# EAGLE board MGBC-MBL-01_2_0 (EAGLE 9.6.2), part 1 of 2
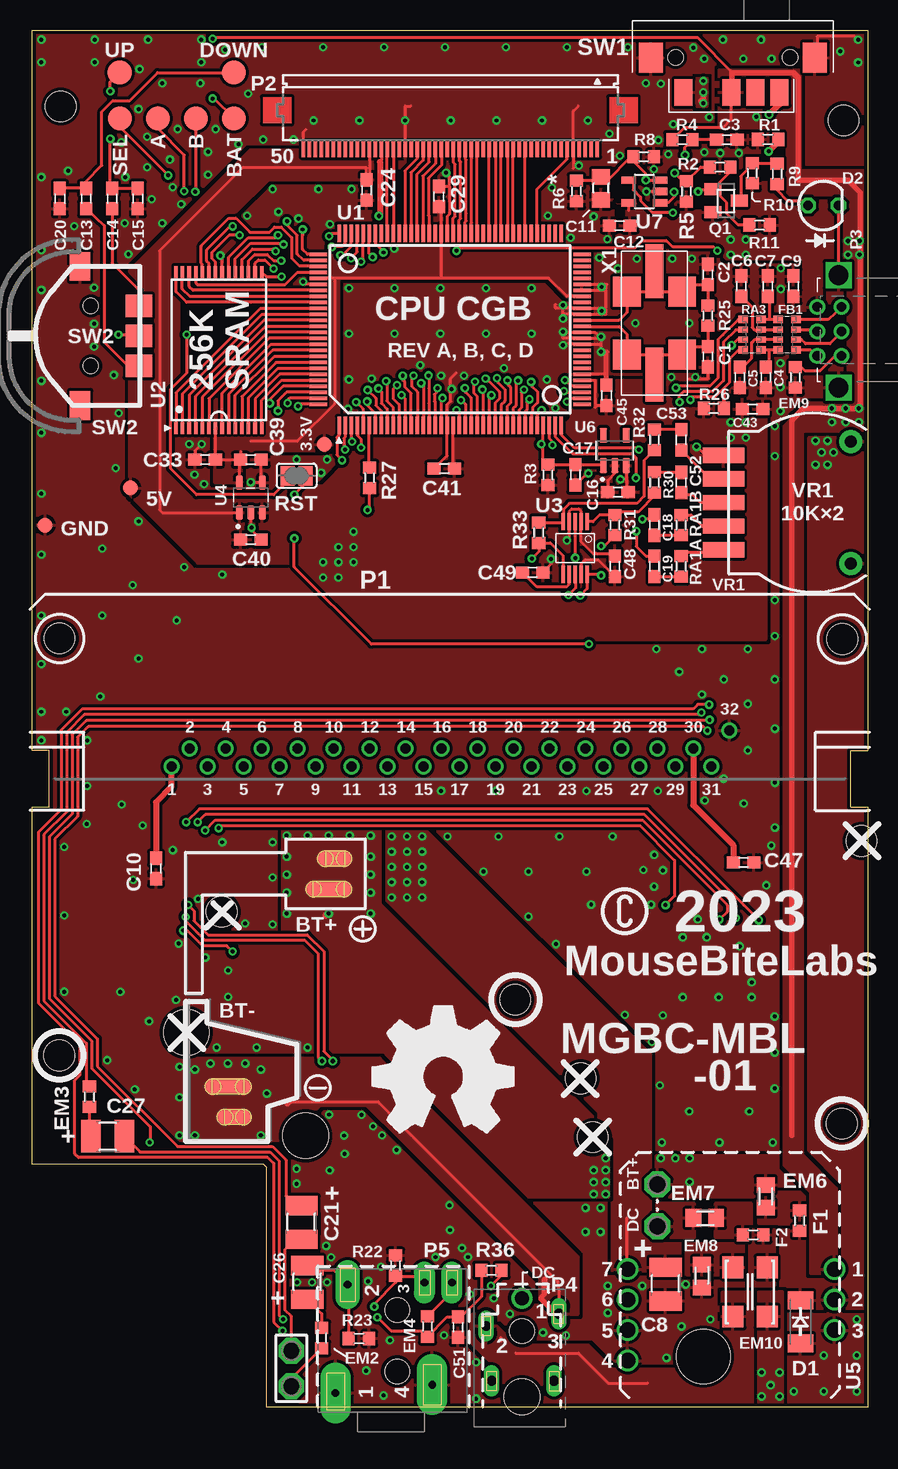
[diagram p0: board, top side]
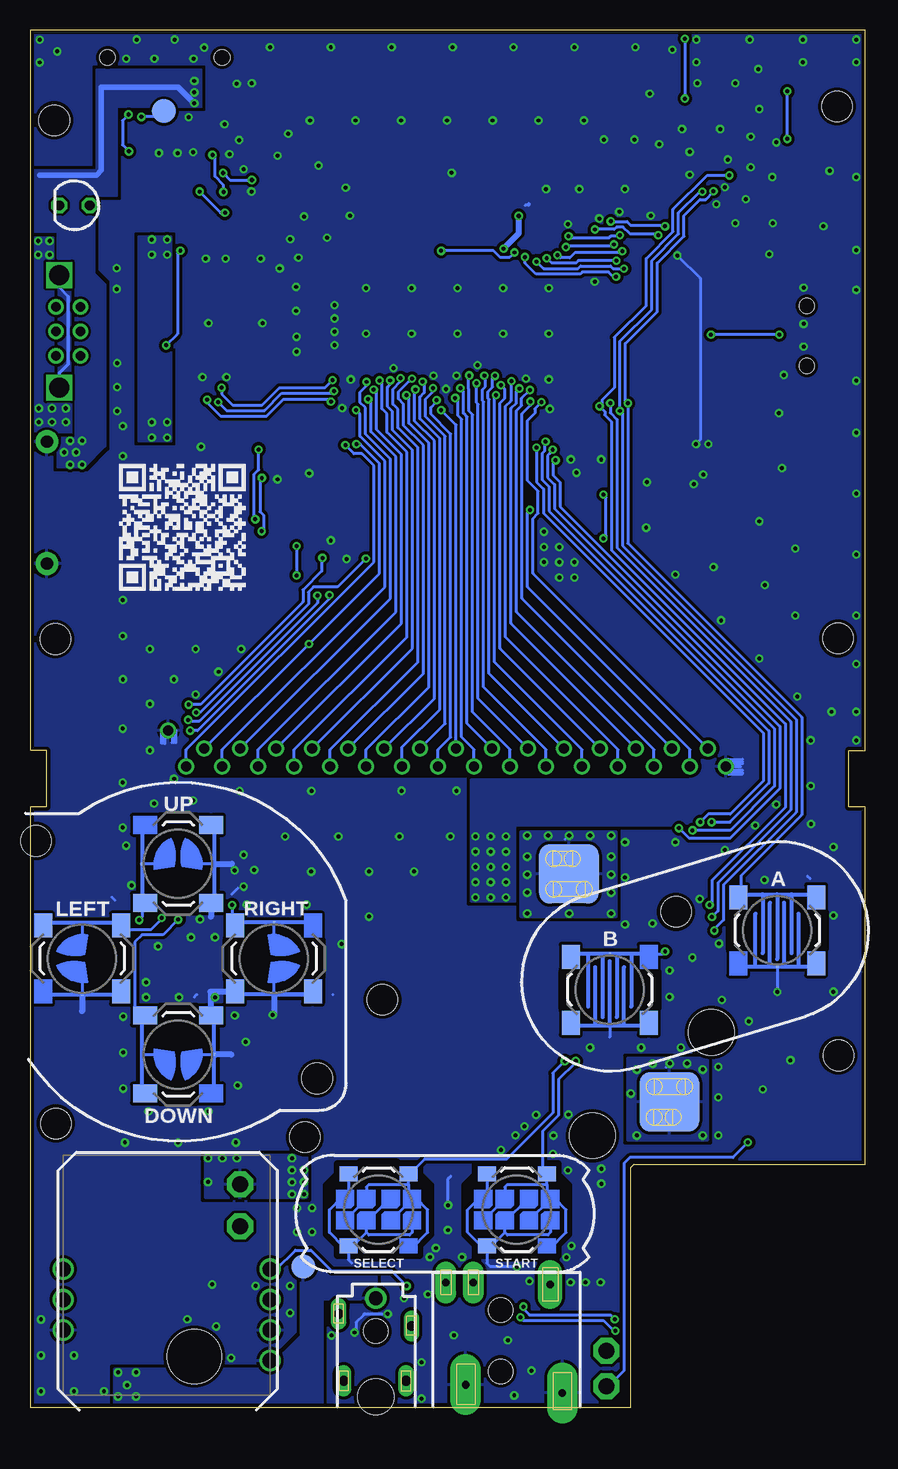
[diagram p1: board, bottom side, seen from below]

Size 69.65 x 114.8 mm. Coordinates in mm from the lower left corner, seen from the top.
Outline: 0,54.75 0,114.8 69.65,114.8 69.65,54.73 68.24,54.73 68.24,50.03 69.65,50.03 69.65,0 19.55,0 19.55,20 19.3,20.25 0,20.25 0,50.05 1.4,50.05 1.4,54.75 0,54.75
Copper layers (1*16): Top 0.0356mm / dielectric 1.5011mm / Bottom 0.0356mm
Design rules "jlcpcb *": minimum track width 10mil, minimum drill 13mil, track to track 8mil, track to pad 8mil, pad to pad 7mil, via to via 8mil, smd to smd 5mil, copper to edge 12mil, drill to drill 22mil, minimum pad ring 10mil, minimum via ring 7mil, stop-mask expansion 2.5mil, vias tented up to drill 14mil, thermal gap 10mil
Holes 2.54 mm at 2.36,108.43 67.63,107.27 2.27,64.08 67.54,64.03 2.24,29.33 67.5,23.64 40.27,33.97 45.71,27.4 46.73,22.5 15.79,41.29 69.14,47.19
Holes 3.81 mm at 12.84,31.23 22.77,22.63
Holes 4.5 mm at 55.95,4.22
tRestrict: area 24.6,-0.8 to 27.7,-0.1; area 45.5,88.8 to 46.2,91.6; area 22.5,14.3 to 23.7,16.2; area 23.8,-1.8 to 35.8,-0.1; area 46.7,21.5 to 48,22.4; area 55.4,100.2 to 57.1,100.8; area 48.9,99.5 to 49.1,99.9; area 48.9,100.7 to 49.8,101
bRestrict: area 24.6,-0.8 to 27.7,-0.1; area 32.8,52.9 to 56.3,53.8; area 23.8,-1.8 to 35.8,0; area 3.7,42.8 to 4,43.2; area 17.4,31.2 to 18.3,32.2; area 45.5,33.8 to 46.4,34.9; area 53.7,48.3 to 54.8,49.2; area 45.4,33.8 to 45.6,35.8

## Footprints (pad centres in the part's own frame; a part is rotated, then mirrored left to right if it is on the bottom)
B1,27 = smd 1.27 x 1.27: TP 0,0
MGB+BATTERY4 = smd 4.953 x 4.953 bottom: P$1 0.5,0 | smd 2.959 x 1.397: P$2 0.997,1.27 | smd 3.937 x 1.397: P$3 0.514,-1.27
MGB-BATTERY4 = smd 4.953 x 4.953 bottom: P$1 0.25,0.117 | smd 2.959 x 1.397: P$3 0.743,-1.143 | smd 3.937 x 1.397: P$4 0.26,1.397
DMG_BTN3 = smd 1.5 x 2: P$1 -3.25,2.75; P$3 3.25,2.75; P$4 3.25,-2.75 | smd 0.25 x 0.25: P$2 0,-3
TP20R = smd 2 x 2: TP 0,0
P1-13 = drill 1.321 pad 2.159 octagon: TP 0,0
C0603 = smd 1.1 x 1: 1 -0.85,0; 2 0.85,0
C1210 = smd 1.6 x 2.7: 1 -1.4,0; 2 1.4,0
C0805 = smd 1.3 x 1.5: 1 -0.95,0; 2 0.95,0
SOD-123_MINI-SMA = smd 1.5 x 2.1: A 1.8,0; C -1.8,0
LED3MM = drill 0.813 octagon: A -1.27,0; K 1.27,0
MGB_BTN1_2 = smd 1.5 x 2: P$1 -3.25,2.75; P$3 3.25,2.75; P$4 3.25,-2.75 | smd 0.25 x 0.25: P$2 0,-3
R0603 = smd 1 x 1.1: 1 -0.85,0; 2 0.85,0
R0805 = smd 1.3 x 1.5: 1 -0.95,0; 2 0.95,0
ACM4532 = smd 1.8 x 1.75: 1 -2.05,1.425; 2 -2.05,-1.425; 3 2.05,-1.425; 4 2.05,1.425
EXB38V = smd 0.6 x 0.8: 1 -1.275,-0.75; 4 1.275,-0.75; 5 1.275,0.75; 8 -1.275,0.75 | smd 0.5 x 0.8: 2 -0.4,-0.75; 3 0.4,-0.75; 6 0.4,0.75; 7 -0.4,0.75
MGB-CART = drill 0.83: 1 0,0; 2 1.5,1.5; 3 3,0; 4 4.5,1.5; 5 6,0; 6 7.5,1.5; 7 9,0; 8 10.5,1.5; 9 12,0; 10 13.5,1.5; 11 15,0; 12 16.5,1.5; 13 18,0; 14 19.5,1.5; 15 21,0; 16 22.5,1.5; 17 24,0; 18 25.5,1.5; 19 27,0; 20 28.5,1.5; 21 30,0; 22 31.5,1.5; 23 33,0; 24 34.5,1.5; 25 36,0; 26 37.5,1.5; 27 39,0; 28 40.5,1.5; 29 42,0; 30 43.5,1.5; 31 45,0; 32 46.5,3
62684-502100AHLF = smd 0.3 x 1.3: 1 -12.25,3.25; 2 -11.75,3.25; 3 -11.25,3.25; 4 -10.75,3.25; 5 -10.25,3.25; 6 -9.75,3.25; 7 -9.25,3.25; 8 -8.75,3.25; 9 -8.25,3.25; 10 -7.75,3.25; 11 -7.25,3.25; 12 -6.75,3.25; 13 -6.25,3.25; 14 -5.75,3.25; 15 -5.25,3.25; 16 -4.75,3.25; 17 -4.25,3.25; 18 -3.75,3.25; 19 -3.25,3.25; 20 -2.75,3.25; 21 -2.25,3.25; 22 -1.75,3.25; 23 -1.25,3.25; 24 -0.75,3.25; 25 -0.25,3.25; 26 0.25,3.25; 27 0.75,3.25; 28 1.25,3.25; 29 1.75,3.25; 30 2.25,3.25; 31 2.75,3.25; 32 3.25,3.25; 33 3.75,3.25; 34 4.25,3.25; 35 4.75,3.25; 36 5.25,3.25; 37 5.75,3.25; 38 6.25,3.25; 39 6.75,3.25; 40 7.25,3.25; 41 7.75,3.25; 42 8.25,3.25; 43 8.75,3.25; 44 9.25,3.25; 45 9.75,3.25; 46 10.25,3.25; 47 10.75,3.25; 48 11.25,3.25; 49 11.75,3.25; 50 12.25,3.25
CGB-LINK = drill 0.8: +5V 1.909,2.032; CLK -2.159,2.032; GND -2.159,0; IN -0.125,2.032; OUT 1.909,0; SD -0.125,0 | drill 1.651 pad 1.905 square: P$7 -4.822,0.254; P$10 4.572,0.254
MGB-PWRJACK = drill 1.143 pad 1.778: 1 -3.629,-2.005 | drill 0.8 pad 1.3 long: 2 -6.604,-4.314; 3 -0.539,-3.302; 4 -6.15,-8.89; 5 -0.953,-8.89 | hole 3: -3.619,-10.222 | hole 2.032: -3.619,-4.753
MGB-HEADPHONE = drill 0.635 pad 2.54 long: GND -4.644,-4.246; SWGND 3.425,-3.556 | drill 0.635 pad 2.032 long: L -3.623,4.779 | drill 0.635 pad 1.75 long: R 2.79,4.949; SW 5.08,4.949 | hole 2.032: 0.508,2.676; 0.508,-2.442
SOT23 = smd 1 x 1.4: 1 -0.95,-1.1; 2 0.95,-1.1; 3 0,1.1
SJ = smd 1.168 x 1.6: 1 -0.762,0; 2 0.762,0
DMG_BTN1_W2 = smd 1.25 x 1.5: P$1 -3,2.5; P$3 3,2.5; P$4 3,-2.5 | smd 0.05 x 0.05: P$2 0,-4.07
MGB-SWITCH = smd 1.5 x 2.2: P$1 -3.75,-2.141; P$2 2.25,-2.141; P$3 4.25,-2.141; P$C 0.25,-2.141 | smd 2 x 2.5: P$MP1 -6.48,0.759; P$MP2 7.22,0.759 | hole 1.3: -4.4,0.759; 5.15,0.759
NAV_SWITCH = smd 1.9 x 2.2: 1 -2.5,-4; 2 2.5,-4; T 0,-4 | smd 2.4 x 1.7: C 5.8,0.9; NC -5.8,0.9 | hole 1.25: -2.5,0; 2.5,0
QFP-128 = smd 0.3 x 1.45: 1 -8.25,-4.5; 2 -7.75,-4.5; 3 -7.25,-4.5; 4 -6.75,-4.5; 5 -6.25,-4.5; 6 -5.75,-4.5; 7 -5.25,-4.5; 8 -4.75,-4.5; 9 -4.25,-4.5; 10 -3.75,-4.5; 11 -3.25,-4.5; 12 -2.75,-4.5; 13 -2.25,-4.5; 14 -1.75,-4.5; 15 -1.25,-4.5; 16 -0.75,-4.5; 17 -0.25,-4.5; 18 0.25,-4.5; 19 0.75,-4.5; 20 1.25,-4.5; 21 1.75,-4.5; 22 2.25,-4.5; 23 2.75,-4.5; 24 3.25,-4.5; 25 3.75,-4.5; 26 4.25,-4.5; 27 4.75,-4.5; 28 5.25,-4.5; 29 5.75,-4.5; 30 6.25,-4.5; 31 6.75,-4.5; 32 7.25,-4.5; 33 7.75,-4.5; 34 8.25,-4.5; 35 8.75,-4.5; 36 9.25,-4.5; 37 9.75,-4.5; 38 10.25,-4.5; 65 10.25,11.5; 66 9.75,11.5; 67 9.25,11.5; 68 8.75,11.5; 69 8.25,11.5; 70 7.75,11.5; 71 7.25,11.5; 72 6.75,11.5; 73 6.25,11.5; 74 5.75,11.5; 75 5.25,11.5; 76 4.75,11.5; 77 4.25,11.5; 78 3.75,11.5; 79 3.25,11.5; 80 2.75,11.5; 81 2.25,11.5; 82 1.75,11.5; 83 1.25,11.5; 84 0.75,11.5; 85 0.25,11.5; 86 -0.25,11.5; 87 -0.75,11.5; 88 -1.25,11.5; 89 -1.75,11.5; 90 -2.25,11.5; 91 -2.75,11.5; 92 -3.25,11.5; 93 -3.75,11.5; 94 -4.25,11.5; 95 -4.75,11.5; 96 -5.25,11.5; 97 -5.75,11.5; 98 -6.25,11.5; 99 -6.75,11.5; 100 -7.25,11.5; 101 -7.75,11.5; 102 -8.25,11.5 | smd 1.45 x 0.3: 39 12,-2.75; 40 12,-2.25; 41 12,-1.75; 42 12,-1.25; 43 12,-0.75; 44 12,-0.25; 45 12,0.25; 46 12,0.75; 47 12,1.25; 48 12,1.75; 49 12,2.25; 50 12,2.75; 51 12,3.25; 52 12,3.75; 53 12,4.25; 54 12,4.75; 55 12,5.25; 56 12,5.75; 57 12,6.25; 58 12,6.75; 59 12,7.25; 60 12,7.75; 61 12,8.25; 62 12,8.75; 63 12,9.25; 64 12,9.75; 103 -10,9.75; 104 -10,9.25; 105 -10,8.75; 106 -10,8.25; 107 -10,7.75; 108 -10,7.25; 109 -10,6.75; 110 -10,6.25; 111 -10,5.75; 112 -10,5.25; 113 -10,4.75; 114 -10,4.25; 115 -10,3.75; 116 -10,3.25; 117 -10,2.75; 118 -10,2.25; 119 -10,1.75; 120 -10,1.25; 121 -10,0.75; 122 -10,0.25; 123 -10,-0.25; 124 -10,-0.75; 125 -10,-1.25; 126 -10,-1.75; 127 -10,-2.25; 128 -10,-2.75
TSOP1-28 = smd 1 x 0.3: 1 -6.5,3.575; 2 -6.5,3.025; 3 -6.5,2.475; 4 -6.5,1.925; 5 -6.5,1.375; 6 -6.5,0.825; 7 -6.5,0.275; 8 -6.5,-0.275; 9 -6.5,-0.825; 10 -6.5,-1.375; 11 -6.5,-1.925; 12 -6.5,-2.475; 13 -6.5,-3.025; 14 -6.5,-3.575; 15 6.5,-3.575; 16 6.5,-3.025; 17 6.5,-2.475; 18 6.5,-1.925; 19 6.5,-1.375; 20 6.5,-0.825; 21 6.5,-0.275; 22 6.5,0.275; 23 6.5,0.825; 24 6.5,1.375; 25 6.5,1.925; 26 6.5,2.475; 27 6.5,3.025; 28 6.5,3.575
VSSOP10 = smd 1.45 x 0.3: 1 -2.2,0.985; 2 -2.2,0.485; 3 -2.2,-0.015; 4 -2.2,-0.515; 5 -2.2,-1.015; 6 2.2,-1.015; 7 2.2,-0.515; 8 2.2,-0.015; 9 2.2,0.485; 10 2.2,0.985
SOT95P280X145-5N = smd 1.21 x 0.59: 1 -1.255,0.95; 2 -1.255,0; 3 -1.255,-0.95; 4 1.255,-0.95; 5 1.255,0.95
MGB-PWRBD = drill 1.27: 1 -0.25,10.5; 2 -0.25,7.96; 3 -0.25,5.42; 4 17,2.88; 5 17,5.42; 6 17,7.96; 7 17,10.5
SOT-23-5 = smd 1.21 x 0.59: 1 -1.255,0.95; 2 -1.255,0; 3 -1.255,-0.95; 4 1.255,-0.95; 5 1.255,0.95
DBV-R-PDSO-G5 = smd 0.6 x 1.2: 1 -0.95,-1.306; 2 0,-1.306; 3 0.95,-1.306; 4 0.95,1.306; 5 -0.95,1.306
MGB-POT = smd 1.27 x 3.429: P$1 -3.937,-5.524; P$2 -1.968,-5.524; P$3 0,-5.524; P$4 1.968,-5.524; P$5 3.937,-5.524 | drill 1.016 pad 1.905: P$6 -5.08,5.08; P$7 5.08,5.08
7.5X5-4-PAD = smd 2.3 x 2.5: 1 2.3,-2.625; 2 2.3,2.625; 3 -2.3,2.625; 4 -2.3,-2.625 | smd 1.5 x 4.5: 5 0,-4.275; 6 0,4.325

## Placement (x,y rotation side)
3.3V  PTR1B1,27  [B1,27]  24.35,80.26 0 top
5V  PTR1B1,27  [B1,27]  8.18,76.62 0 top
+  MGB+BATTERY4  [MGB+BATTERY4]  24.21,44.46 0 top
-  MGB-BATTERY4  [MGB-BATTERY4]  16.08,25.33 0 top
A  DMG-BTN  [DMG_BTN3]  7.36,39.74 0 bottom
B  DMG-BTN  [DMG_BTN3]  21.31,34.79 180 bottom
BATT  PTR1TP20R  [TP20R]  16.82,107.43 0 top
BRIGHTNESS  PTR1TP20R  [TP20R]  16.79,111.24 0 top
BT+  TPPAD1-13  [P1-13]  52.12,18.57 0 top
C1  18pF  [C0603]  56.31,87.56 270 top
C2  27pF  [C0603]  56.31,94.42 90 top
C3  100n  [C0603]  57.9,105.66 0 top
C4  22pF  [C0603]  61.15,85.84 270 top
C5  100pF  [C0603]  58.99,85.84 270 top
C6  100pF  [C0603]  59.11,93.44 90 top
C7  100pF  [C0603]  61.32,93.44 90 top
C8  100uF  [C1210]  52.8,10.25 270 top
C9  0.01uF  [C0603]  63.46,93.44 90 top
C10  0.01uF  [C0603]  10.3,44.9 270 top
C11  22u  [C0805]  47.42,101.6 270 top
C12  100n  [C0603]  48.96,98.5 180 top
C13  100pF  [C0603]  4.47,100.75 270 top
C14  100pF  [C0603]  6.64,100.75 270 top
C15  27pF  [C0603]  8.8,100.75 270 top
C16  1uF  [C0603]  48.82,76.29 0 top
C17  1uF  [C0603]  45.27,77.72 270 top
C18  1uF  [C0603]  51.87,73.53 270 top
C19  1uF  [C0603]  51.87,70.1 270 top
C20  27pF  [C0603]  2.3,100.75 270 top
C21  100uF  [C1210]  22.44,15.39 90 top
C24  0.1uF  [C0603]  27.87,101.46 270 top
C26  100uF  [C1210]  22.92,10.4 90 top
C27  100uF  [C1210]  6.28,22.58 0 top
C29  0.01uF  [C0603]  33.88,100.91 90 top
C33  0.01uF  [C0603]  14.41,78.99 180 top
C39  1uF  [C0603]  18.21,78.99 0 top
C40  1uF  [C0603]  18.21,72.32 0 top
C41  0.01uF  [C0603]  34.34,78.22 180 top
C43  0.1uF  [C0603]  60.05,83.21 0 top
C45  0.01uF  [C0603]  47.88,84.34 90 top
C47  150pF  [C0603]  59.29,45.4 0 top
C48  1uF  [C0603]  48.57,70.1 90 top
C49  1uF  [C0603]  41.71,69.59 0 top
C51  1uF  [C0603]  35.49,6.67 270 top
C52  100nF  [C0603]  54.09,77.08 90 top
C53  100nF  [C0603]  54.09,80.64 90 top
D1  CGRM4001-G  [SOD-123_MINI-SMA]  64.05,7.12 270 top
D2  [LED3MM]  65.94,100.17 0 top
DC  TPPAD1-13  [P1-13]  52.12,15.07 0 top
DC_IN  TPTP20R  [TP20R]  46.88,11.72 0 bottom
DOWN  DMG-BTN  [MGB_BTN1_2]  57.3,29.4 90 bottom
EM2  BLM18BD102SN1D  [R0603]  24.12,5.76 90 top
EM3  BLM18BD102SN1D  [R0603]  4.75,25.87 270 top
EM4  BLM18BD102SN1D  [R0603]  32.95,6.73 90 top
EM6  Z0805C221BPWZT  [R0805]  61.13,17.57 270 top
EM7  Z0805C221BPWZT  [R0805]  56.07,15.76 180 top
EM8  Z0805C221BPWZT  [R0805]  55.83,10.92 270 top
EM9  BLM18BD102SN1D  [R0603]  63.62,85.84 270 top
EM10  [ACM4532]  59.84,9.6 270 top
F1  1A  [R0603]  63.97,15.54 270 top
F2  1A  [R0603]  60.11,14.35 180 top
FB1  BLA31AG601SN4D  [EXB38V]  62.92,89.4 90 top
GND  PTR1B1,27  [B1,27]  1.07,73.53 0 top
LEFT  DMG-BTN  [MGB_BTN1_2]  65.3,37.4 0 bottom
OSD_A  PTR1TP20R  [TP20R]  10.47,107.43 0 top
OSD_B  PTR1TP20R  [TP20R]  13.64,107.43 0 top
OSD_SEL  PTR1TP20R  [TP20R]  7.29,107.43 0 top
P1  MGB-CART  [MGB-CART]  11.61,53.4 0 top
P2  GBC_LCDH  [62684-502100AHLF]  34.85,108.11 180 top
P3  LINKPORTDMG-LINK-SHORT  [CGB-LINK]  67.48,89.8 90 top
P4  MGB-PWRJACK  [MGB-PWRJACK]  44.44,11.08 0 top
P5  MGBHPMGB  [MGB-HEADPHONE]  29.9,5.42 0 top
PALETTE  PTR1TP20R  [TP20R]  7.28,111.24 0 top
Q1  BSS84  [SOT23]  57.84,100.58 270 top
R1  1k  [R0603]  61.33,105.68 180 top
R2  1.5M  [R0603]  57.33,103.37 180 top
R3  18k  [R0603]  42.98,77.72 90 top
R4  100k  [R0603]  54.2,105.66 180 top
R5  100k  [R0603]  54.54,101.34 270 top
R6  124k  [R0603]  45.36,101.38 90 top
R8  249k  [R0603]  50.98,104.23 180 top
R9  18k  [R0603]  62.1,102.8 270 top
R10  100k  [R0603]  60.02,102.86 90 top
R11  18k  [R0603]  60.63,98.54 180 top
R22  1k  [R0603]  30.28,11.8 90 top
R23  1k  [R0603]  27.23,5.72 0 top
R25  1.5M  [R0603]  56.31,90.99 90 top
R26  5.6k  [R0603]  56.82,83.26 180 top
R27  100  [R0603]  28.12,77.46 270 top
R30  100k  [R0603]  51.87,77.08 90 top
R31  18k  [R0603]  48.57,73.53 90 top
R32  100k  [R0603]  51.87,80.64 90 top
R33  18k  [R0603]  42.22,72.89 90 top
R36  100k  [R0603]  38.28,11.41 0 top
RA1A  510  [R0603]  54.09,70.1 270 top
RA1B  510  [R0603]  54.09,73.53 270 top
RA3  270  [EXB38V]  60,89.4 90 top
RIGHT  DMG-BTN  [MGB_BTN1_2]  49.3,37.4 180 bottom
RST  [SJ]  22.03,77.64 180 top
SELECT  DMG-BTN  [DMG_BTN1_W2]  40.59,16.46 90 bottom
SPK+  PTR1PAD1-13  [P1-13]  21.59,4.69 0 top
SPK-  PTR1PAD1-13  [P1-13]  21.59,1.75 0 top
START  DMG-BTN  [DMG_BTN1_W2]  29.06,16.46 90 bottom
SW  TPTP20R  [TP20R]  58.5,108.05 0 bottom
SW1  MGB-SW1  [MGB-SWITCH]  58.03,111.75 0 top
SW2  NAV_SWITCH  [NAV_SWITCH]  4.87,89.3 90 top
U1  GBC_CPU  [QFP-128]  33.84,86.35 0 top
U2  LH52256CVTXIZ  [TSOP1-28]  15.55,88.13 90 top
U3  LM4853  [VSSOP10]  45.27,71.62 270 top
U4  TLV70233QDBVRQ1  [SOT95P280X145-5N]  18.21,75.81 90 top
U5  MGB-PWR_BD  [MGB-PWRBD]  66.63,1 0 bottom
U6  TPS3840  [SOT-23-5]  48.57,79.75 90 top
U7  TL331  [DBV-R-PDSO-G5]  51.03,101.34 90 top
UP  DMG-BTN  [MGB_BTN1_2]  57.3,45.3 270 bottom
VR1  [MGB-POT]  63.16,75.41 270 top
X1  8.388608MHZ12SMX-B-4-PAD  [7.5X5-4-PAD]  51.87,90.35 0 top

## Library data of the parts
3.3V 5V BATT BRIGHTNESS BT+ DC DC_IN GND OSD_A OSD_B OSD_SEL PALETTE SPK+ SPK- SW = testpad
+ - P1 P3-P5 SW1 U5 VR1 = Game Boy
A B DOWN LEFT RIGHT SELECT START SW2 U1-U3 UP X1 = gameboy
C1-C21 C24 C26 C27 C29 C33 C39-C41 C43 C45 C47-C49 C51-C53 = rcl; SPICEPREFIX: C
D1 = diode
D2 = led
EM2-EM4 EM6-EM9 F1 F2 R1-R6 R8-R11 R22 R23 R25-R27 R30-R33 R36 RA1A RA1B = rcl; SPICEPREFIX: R
EM10 = gameboy; OC_FARNELL: unknown; OC_NEWARK: unknown
FB1 RA3 = resistor-dil; OC_FARNELL: unknown; OC_NEWARK: unknown
P2 = gameboy; MPN: 62684-502100AHLF; OC_FARNELL: 1324557; OC_NEWARK: 34M6181
Q1 = transistor-small-signal
RST = jumper
U4 = TLV70233QDBVRQ1; AVAILABILITY: In Stock; DESCRIPTION: Automotive 300-mA, high-PSRR, low-IQ, low-dropout voltage regulator with enable 5-SOT-23 -40 to 125; MF: Texas Instruments; MP: TLV70233QDBVRQ1; PACKAGE: SOT-23-5 Texas Instruments; PRICE: None; PURCHASE-URL: https://pricing.snapeda.com/search/part/TLV70233QDBVRQ1/?ref=eda
U6 = SOT95P280X145-5N
U7 = linear

## Nets
!CS1: U1.110 U2.27
!MRD: U1.112 U2.1
!MWR: U1.117 U2.6
+3V3: 3.3V.TP C29.1 C33.1 C39.1 P2.37 U1.57 U1.85 U1.107 U2.7 U4.5
+5V: 5V.TP C8.1 C9.1 C10.1 C12.1 C16.1 C24.1 C40.1 C41.1 C43.1 C45.1 C48.1 P1.1 P2.39 P3.+5V Q1.2 R3.1 R5.2 R10.1 R11.1 R26.2 R36.2 U1.20 U1.43 U3.9 U4.1 U4.3 U5.7 U6.2 U7.5
-15V: U5.6
A0: P1.6 U1.9
A1: P1.7 U1.10
A2: P1.8 U1.11
A3: P1.9 U1.12
A4: P1.10 U1.13
A5: P1.11 U1.14
A6: P1.12 U1.15
A7: P1.13 U1.16
A8: P1.14 U1.17
A9: P1.15 U1.18
A10: P1.16 U1.21
A11: P1.17 U1.22
A12: P1.18 U1.23
A13: P1.19 U1.24
A14: P1.20 U1.25
A15: P1.21 U1.26
BATT: +.P$1 +.P$2 +.P$3 BT+.TP EM6.1
BATT_LVL: Q1.1 R2.1 R11.2 U7.4
BATT_SENSE: C3.1 R4.1 U7.1
BATT_TH: C11.1 R2.2 R5.1 R6.2 R8.2 U7.3
CK1: C1.1 R25.1 U1.52 X1.1 X1.4 X1.5
CK2: C2.1 R25.2 U1.53 X1.2 X1.3 X1.6
CLK: P1.2 U1.5
CLS: U1.70
CS: P1.5 U1.8
D0: P1.22 U1.27
D1: P1.23 U1.28
D2: P1.24 U1.29
D3: P1.25 U1.30
D4: P1.26 U1.31
D5: P1.27 U1.32
D6: P1.28 U1.33
D7: P1.29 U1.34
DCK: P2.36 U1.94
ELP2: FB1.4 P3.OUT
ELP3: FB1.3 P3.IN
ELP4: FB1.2 P3.SD
ELP5: FB1.1 P3.CLK
EM10_GND: EM10.3 P4.2
EM10_POS: DC_IN.TP EM10.4 P4.1
GND: A.P$2 B.P$1 C1.2 C2.2 C3.2 C4.2 C5.2 C6.2 C7.2 C8.2 C9.2 C10.2 C11.2 C12.2 C15.2 C16.2 C17.2 C20.2 C24.2 C29.2 C33.2 C39.2 C40.2 C41.2 C43.2 C45.2 C47.2 C48.2 C49.2 C51.2 D1.A D2.K DOWN.P$2 EM8.2 EM9.2 GND.TP LEFT.P$2 P1.32 P2.5 P2.33 P2.50 P3.P$7 P3.P$10 P5.GND P5.SWGND R1.2 R6.1 R8.1 R22.2 R23.2 RIGHT.P$1 SELECT.P$1 START.P$1 SW1.P$MP1 SW1.P$MP2 SW2.C U1.19 U1.44 U1.49 U1.50 U1.51 U1.54 U1.55 U1.58 U1.59 U1.84 U1.108 U2.21 U3.2 U3.4 U4.2 U4.4 U5.3 U5.4 U5.5 U6.3 U7.2 UP.P$1 VR1.P$1 VR1.P$6 VR1.P$7
HP_SWITCH: C51.1 EM4.1 R36.1 U3.3
LDB0: U1.86
LDB1: P2.27 U1.87
LDB2: P2.28 U1.88
LDB3: P2.29 U1.89
LDB4: P2.30 U1.90
LDB5: P2.31 U1.91
LDG0: U1.78
LDG1: P2.21 U1.79
LDG2: P2.22 U1.80
LDG3: P2.23 U1.81
LDG4: P2.24 U1.82
LDG5: P2.25 U1.83
LDR0: U1.72
LDR1: P2.15 U1.73
LDR2: P2.16 U1.74
LDR3: P2.17 U1.75
LDR4: P2.18 U1.76
LDR5: P2.19 U1.77
LIN_AMP: R30.1 R31.2 U3.1
LP: P2.35 U1.93
M1: U1.56
MA0: U1.99 U2.17
MA1: U1.98 U2.16
MA2: U1.97 U2.15
MA3: U1.124 U2.14
MA4: U1.123 U2.13
MA5: U1.122 U2.12
MA6: U1.121 U2.11
MA7: U1.120 U2.10
MA8: U1.115 U2.4
MA9: U1.114 U2.3
MA10: U1.111 U2.28
MA11: U1.113 U2.2
MA12: U1.119 U2.9
MD0: U1.100 U2.18
MD1: U1.101 U2.19
MD2: U1.102 U2.20
MD3: U1.103 U2.22
MD4: U1.104 U2.23
MD5: U1.105 U2.24
MD6: U1.106 U2.25
MD7: U1.109 U2.26
MD8: U1.67
MD9: U1.66
MD10: U1.65
MD11: U1.64
MD12: U1.63
MD13: U1.62
MD14: U1.61
MD15: U1.60
MOD: U1.68
N$1: C7.1 FB1.5 RA3.4
N$2: C6.1 FB1.6 RA3.3
N$3: D2.A R9.2
N$4: C52.2 R30.2
N$5: C53.2 R32.2
N$6: C5.1 FB1.7 RA3.2
N$7: C52.1 VR1.P$3
N$8: R27.1 U1.6
N$9: C4.1 FB1.8 RA3.1
N$10: C53.1 VR1.P$2
N$11: R1.1 SW1.P$3
N$12: DC.TP EM7.2
N$13: EM7.1 F2.2
N$15: D1.C F1.2 SW1.P$1 U5.2
N$16: EM6.2 F1.1
N$17: EM10.1 F2.1
N$18: RA3.6 U1.41
N$19: Q1.3 R9.1 R10.2
N$20: EM8.1 EM10.2
N$23: BRIGHTNESS.TP C13.1 C20.1
N$24: EM9.1 P3.GND
N$25: C14.1 C15.1 PALETTE.TP
N$29: C49.1 U3.7
N$35: EM4.2 P5.SW
N$40: C27.2 P5.R R22.1
N$41: C26.2 P5.L R23.1
N$42: C26.1 EM2.2
N$43: C27.1 EM3.2
N$44: C21.1 SPK+.TP
P00: RIGHT.P$2 U1.1
P01: LEFT.P$1 U1.4
P02: U1.3 UP.P$2
P03: DOWN.P$1 U1.2
P10: A.P$1 OSD_A.TP U1.125
P11: B.P$2 OSD_B.TP U1.126
P12: OSD_SEL.TP SELECT.P$2 U1.128
P13: START.P$2 U1.127
PS: U1.92
PUSH: RST.2 SW2.T
R0: U1.45
R1: U1.46
R2: U1.47
R3: U1.48
R4: RA3.7 U1.96
RA0: U1.116 U2.5
RA1: U1.118 U2.8
RA1-S01: C19.2 RA1A.2
RA1-S02: C18.2 RA1B.2
RD: P1.4 U1.7
RES: C17.1 C47.1 P1.30 R3.2 RST.1 U1.35 U6.1
RIN_AMP: R32.1 R33.2 U3.5
ROCK_DOWN: C14.2 SW2.2
ROCK_UP: C13.2 SW2.1
ROUT: EM3.1 R33.1 U3.6
S01: C19.1 U1.37
S02: C18.1 U1.38
SCK: R26.1 RA3.8 U1.40
SOUT: RA3.5 U1.42
SPK+: C21.2 U3.8
SPK-: EM2.1 R31.1 SPK-.TP U3.10
SPL: P2.13 U1.71
SPS: P2.6 U1.69
SW: BATT.TP R4.2 SW1.P$C SW.TP U5.1
SW1B: -.P$1 -.P$3 -.P$4 P4.3
VIN: P1.31 U1.36
VR1-S01: RA1A.1 VR1.P$5
VR1-S02: RA1B.1 VR1.P$4
WR: P1.3 R27.2